# Altium PCB PCB3.PcbDoc (part 2 of 2)
Units mil, origin at the board's own origin, x right, y up, seen from the top; angles counter-clockwise.
Board outline 4805.03 x 4420.03 mil, 2 copper layers (Top Layer, Bottom Layer); 108 components, 108 nets, 556 pads, 252 vias.
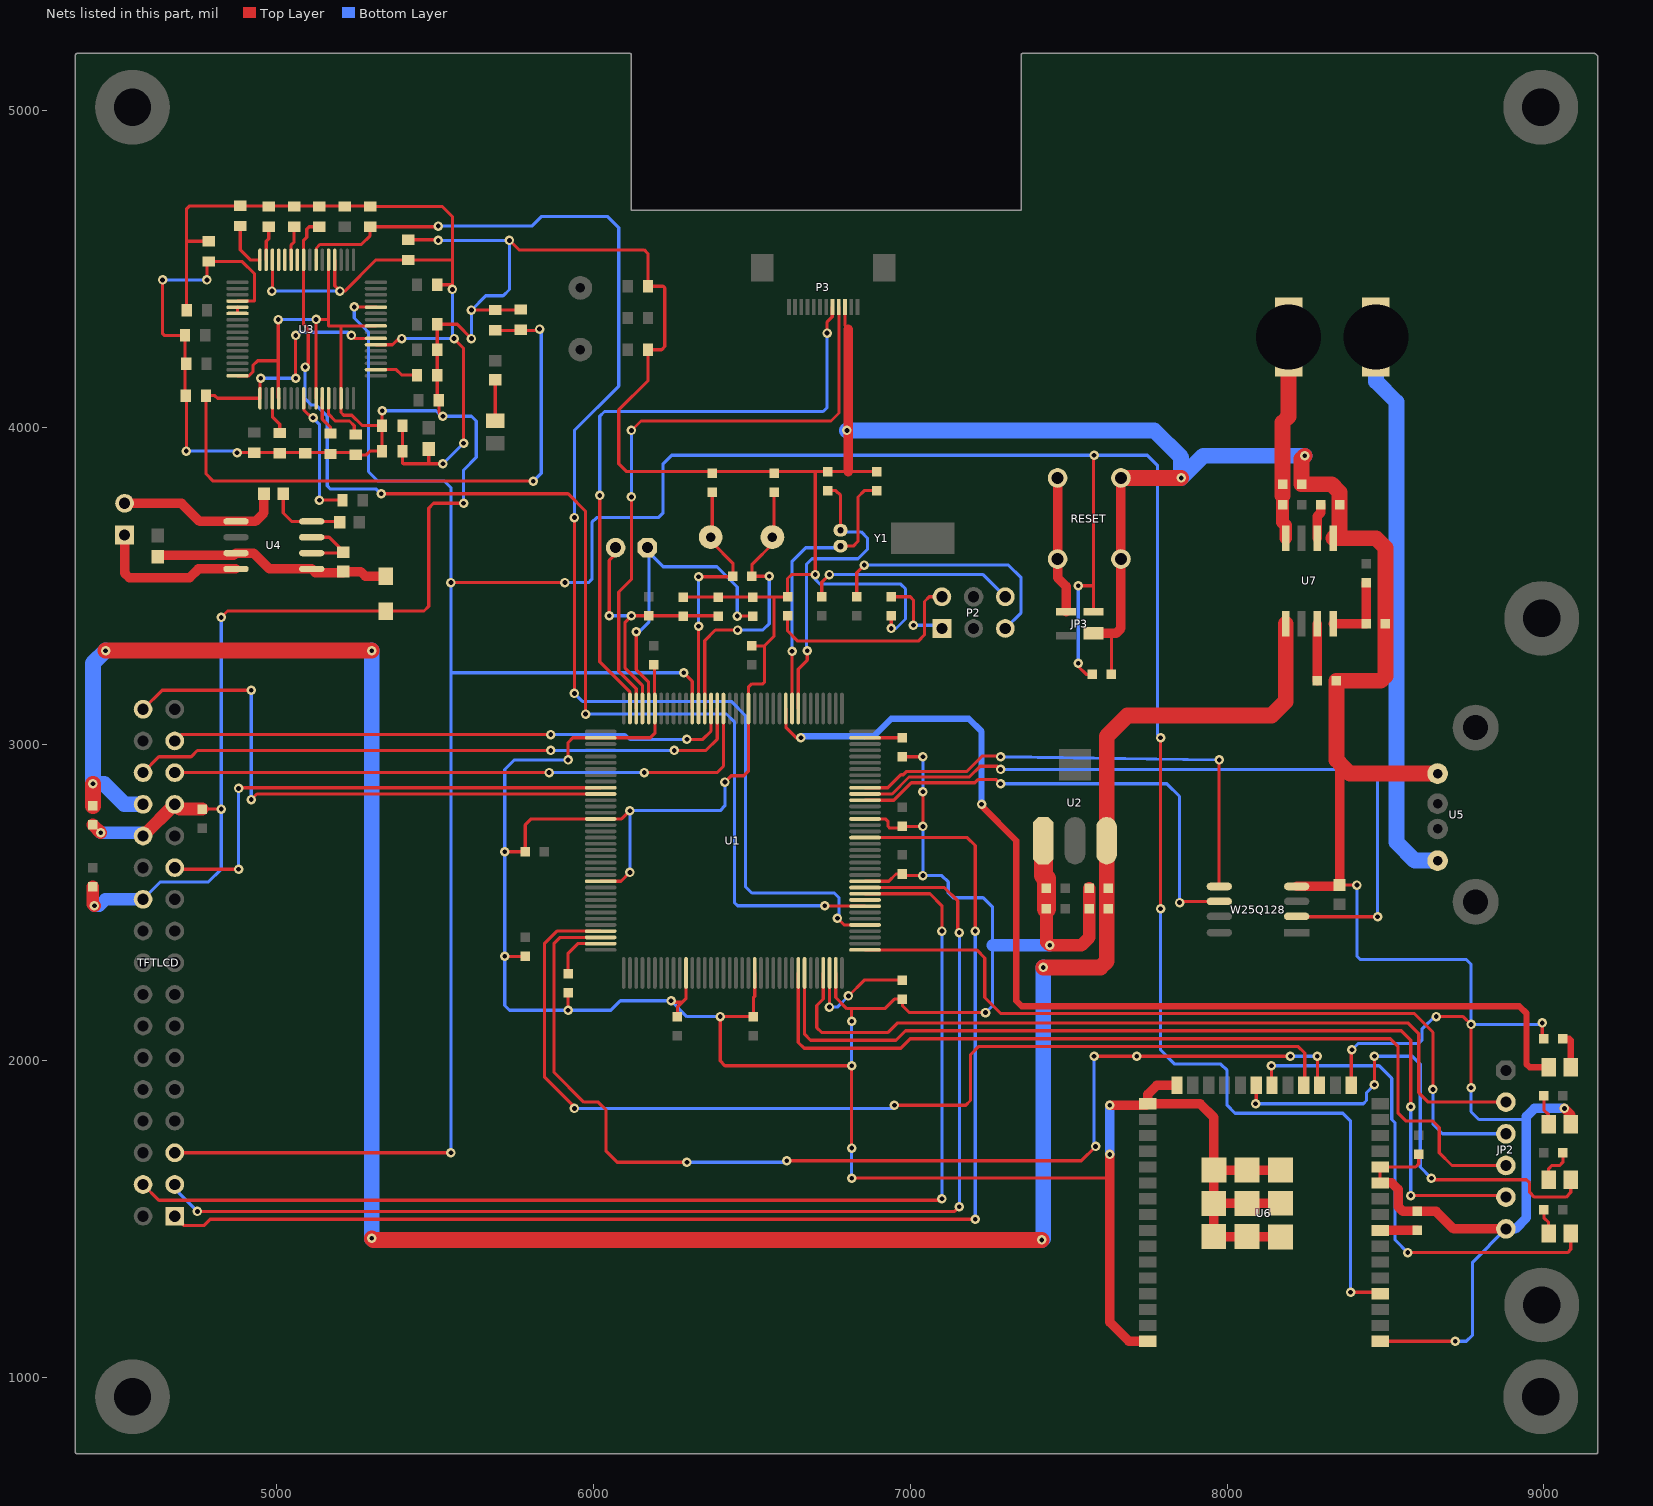
[diagram p2: the nets of this part, all layers, seen from the top]

## Via types
v1: diameter 30, hole 15, Top Layer to Bottom Layer, 252 vias

## Nets (pads, with @x,y where several pads share a name; then routed paths per layer and width w, separated by ;. In a path a pad name is that pad's centre, name@x,y a point inside that pad or via, vN(x,y) a via of type N, cw(c..) or ccw(c..) an arc to the next point about the centre after c; other vN are vias at no path point) (continued)
FSMC_NE4: TFTLCD.1 U1.127 | length 4085.3
  Top Layer w10: TFTLCD.1@4678.35,1510 4708.35,1480 4770,1480 4790,1500 v1(7205,1500) ; U1.127@6857.32,2704.84 7180.16,2704.84 7205,2680 v1(7205,2410)
  Bottom Layer w10: v1(7205,1500) v1(7205,2410)
FSMC_NOE: TFTLCD.4 U1.118 | length 3727.7
  Top Layer w10: TFTLCD.4@4578.35,1610 4628.35,1560 7095,1560 v1(7100,1565) ; U1.118@6857.32,2527.68 7062.32,2527.68 7100,2490 v1(7100,2410)
  Bottom Layer w10: v1(7100,1565) v1(7100,2410)
FSMC_NWE: TFTLCD.3 U1.119 | length 3803.2
  Top Layer w10: v1(4750,1525) 7140,1525 v1(7155,1540) ; U1.119@6857.32,2547.36 7107.64,2547.36 7150,2505 7150,2410 v1(7155,2405)
  Bottom Layer w10: TFTLCD.3@4678.35,1610 4678.35,1596.65 v1(4750,1525) ; v1(7155,1540) v1(7155,2405)
GND: C1.2 C2.2 C3.1 C4.1 C5.1 C6.1 C7.1 C8.1 C9.2 C10.2 C11.2 C12.1 C13.1 C14.2 C15.1 C22.2 C23.1 C24.1 C25.2 C27.2 C28.1 C29.1 C30.1 C31.1 C32.1 C33.1 C34.1 C35.1 C39.2 C40.2 C43.1 C44.2 C45.2 C46.1 C48.2 C127.1 C128.1 C129.1 C130.2 C131.1 C132.2 C133.1 C134.2 C135.1 C136.2 C137.1 JP2.6 JP3.1 P3.3 P.K R4.2 R6.1 R7.1 R9.1 R12.2 R13.2 R16.1 R25.1 R28.2 R112.1 R115.1 RESET.2 TFTLCD.22 TFTLCD.26 TFTLCD.27 U1.16 U1.31 U1.38 U1.51 U1.61 U1.83 U1.94 U1.107 U1.120 U1.130 U2.1 U3.4 U3.10 U3.14 U3.25 U3.37 U3.52 U3.64 U5.1 U6.1 U6.11 U6.12 U6.17 U6.28 U6.29 U6.44 U6.45 U7.1 W25Q128.4 | length 32762.5
  Top Layer w10: v1(4640,4465) 4640,4295 4645,4290 R112.1@4711,4290 4711,4102 C128.1@4713,4100 4715,4098 v1(4715,3925) ; C8.1@4765,2795 v1(4825,2795) ; v1(4780,4465) 4780,4518 C127.1@4785,4523 4892,4523 4930,4485 4930,4398.58 U3.52@4876.5,4398.58 ; v1(4825,3400) 4845,3420 R9.1@5345,3420 5465,3420 5480,3435 5480,3745 5495,3760 v1(5590,3760) ; v1(4875,3920) C132.2@4930,3920 5243,3920 C39.2@5250,3913 5283,3913 5295,3925 C131.1@5333,3925 C130.2@5333,4005 ; U3.64@4876.5,4162.36 4912.91,4162.36 4924.93,4174.38 4924.93,4194.93 4940,4210 5005,4210 ; v1(5005,4340) 5005,4210 ; U3.4@5006.42,4091.5 5005.24,4092.67 5005.24,4129.09 5005,4129.33 5005,4210 ; U3.10@5124.53,4091.5 v1(5124.53,4340.47) 5163.43,4340.47 5163.9,4340 ; U3.37@5163.9,4528.5 5163.9,4340 ; U3.25@5313.5,4319.84 5205,4319.84 ; v1(5333,4052) C130.2@5333,4005 ; C129.1@5415,4592 5508,4592 v1(5510,4590) ; v1(5525,4035) 5512,4048 C133.1@5512,4085 5507,4090 C44.2@5507,4165 C45.2@5507,4245 C136.2@5507,4325 5570,4325 v1(5615,4280) ; v1(5615,4370) C134.2@5690,4370 5768,4370 C135.1@5770,4372 ; v1(5720,2330) C32.1@5785,2330 ; v1(5720,2660) C33.1@5785,2660 5785,2745 5803.9,2763.9 U1.51@6022.68,2763.9 6088.9,2763.9 v1(6115,2790) ; v1(5735,4590) 5765,4560 6160,4560 6172.06,4547.94 C46.1@6172.06,4445 6220,4445 6225,4440 6225,4255 6215,4245 C43.1@6172.06,4245 6172.06,4147.06 6080,4055 6080,3885 6105,3860 6700,3860 ; v1(5920,2160) C25.2@5920,2215 ; v1(5920,2950) 5920,3005 5934.8,3019.8 U1.38@6022.68,3019.8 6179.8,3019.8 6193.94,3033.94 U1.31@6193.94,3112.32 6193.16,3113.1 6193.16,3246.84 C34.1@6190,3250 ; U1.61@6022.68,2567.05 6087.05,2567.05 v1(6115,2595) ; v1(6245,2190) 6240,2185 6280,2185 ; C31.1@6265,2140 6265,2170 6280,2185 ; C24.1@6284.14,3464 C23.1@6393.28,3464 C7.1@6502.43,3464 6570,3464 ; U1.83@6292.36,2277.68 6292.36,2197.36 6280,2185 ; v1(6415,2880) 6435,2900 6475,2900 6489.21,2914.21 U1.16@6489.21,3112.32 6489.21,3179.21 6500,3190 6535,3190 6540,3195 6540,3310 ; C35.1@6500,3310 6540,3310 ; U1.94@6508.9,2277.68 6508.9,2203.9 6505,2200 C30.1@6505,2140 v1(6400,2140) 6400,2000 6415,1985 v1(6815,1985) v1(6815,1725) ; U1.107@6764.8,2277.68 6764.8,2200.2 6800,2165 6815,2165 ; P3.3@6794.06,4380 6794.06,4320.94 6805,4310 ; v1(6815,1630) 7630,1630 ; v1(6815,2125) 6815,2165 ; U1.120@6857.32,2567.05 6932.05,2567.05 6955,2590 C29.1@6975,2590 6980,2585 v1(7040,2585) ; U1.130@6857.32,2763.9 6921.1,2763.9 6930,2755 6930,2740 6935,2735 6970,2735 C28.1@6975,2740 v1(7040,2740) v1(7040,2850) ; C12.1@6895,3860 6805,3860 C13.1@6740,3860 6700,3860 ; v1(6940,3365) R7.1@6940,3405 ; R16.1@6975,2960 v1(7040,2960) ; v1(7237.5,2152.5) 6997.5,2152.5 6975,2175 C27.2@6975,2195 6950,2195 6920,2165 6815,2165 ; 7630,3350.47 7635,3345.47 R28.2@7635,3220 ; C48.2@8355,2555.32 8355.32,2555 v1(8410,2555) ; U6.17@8392.13,1922.87 8392.13,2032.87 v1(8394.25,2035) ; U6.1@8483.07,1115 v1(8720,1115) ; U6.11@8483.07,1615 U6.12@8483.07,1665 8595,1665 8605,1675 C5.1@8605,1705 ; v1(8660,2140) 8745,2140 v1(8770,2115) v1(8770,1915) ; v1(8995,2120) 8995,2075.01 R6.1@9000.01,2070 ; 5163.9,4340 5163.9,4319.84 5205,4319.84 ; 5205,4319.84 5203.27,4318.11 U3.14@5203.27,4091.5 5203.27,4046.73 5212,4038 5237.46,4038 5269.31,4006.14 5331.86,4006.14 C130.2@5333,4005 ; 6540,3310 6570,3340 6570,3464 ; 6570,3464 6611.57,3464 R4.2@6612.57,3465 6612.57,3522.57 6625,3535 v1(6700,3535) 6700,3860
  Top Layer w30: 6805,3860 6805,4310 ; JP3.1@7578.31,3350.47 7630,3350.47 7650.47,3350.47 7665,3365 RESET.2@7665,3584.09 RESET.2@7665,3840 ; v1(7630,1705) 7630,1630 7630,1175 7690,1115 U6.44@7750,1115 ; v1(7630,1860) 7745,1860 U6.29@7750,1865 ; U6.28@7841.73,1922.87 7777.87,1922.87 7750,1895 U6.29@7750,1865 ; U6.45@7957.88,1550.26 U6.45@7958.39,1550.26 ; U6.45@8168.19,1444.71 8167.67,1445.23 U6.45@8063.42,1445.23 U6.45@7957.88,1445.23 7958.39,1445.74 U6.45@7958.39,1550.26 ; U6.45@8168.71,1655.54 8168.45,1655.28 U6.45@7958.39,1655.28 ; U6.45@8168.96,1550.77 8168.45,1550.26 U6.45@7958.39,1550.26 ; W25Q128.4@8219.68,2550.67 8350.35,2550.67 C48.2@8355,2555.32 8355,2940 8345,2950 ; U6.11@8483.07,1615 8520,1615 8540,1595 8540,1540 8555,1525 C6.1@8600,1525 8660,1525 8715,1470 JP2.6@8880,1470 ; v1(9065,1850) 9085.04,1829.96 P.K@9085.04,1800 ; U6.29@7750,1865 7915,1865 7958.39,1821.61 U6.45@7958.39,1655.28 ; U6.45@7958.39,1550.26 U6.45@7958.39,1655.28
  Top Layer w40: C10.2@4420,2550 4420,2495 v1(4425,2490) ; C9.2@4420,2745 4444.89,2720.11 v1(4444.89,2720) ; TFTLCD.26@4578.35,2710 TFTLCD.27@4678.35,2810 4693.35,2795 C8.1@4765,2795 ; C4.1@7430,2480 7430,2375 v1(7440,2365) 7540,2365 7565,2390 C3.1@7565,2480 C1.2@7565,2545
  Top Layer w50: RESET.2@7665,3840 v1(7855,3840) ; v1(8245,3910) 8235,3900 C15.1@8235,3820 8330,3820 8355,3795 C11.2@8355,3755 8355,3670 U7.1@8335,3650 8470,3650 8500,3620 R12.2@8500,3380 8500,3215 8485,3200 R13.2@8345,3200 8345,2950 ; 8355,2940 8387.91,2907.09 U5.1@8664.37,2907.09
  Top Layer w60: U2.1@7420,2695 7420,2585 7430,2575 C2.2@7430,2545 C4.1@7430,2480
  Bottom Layer w10: TFTLCD.22@4578.35,2510 4633.35,2565 4785,2565 4825,2605 v1(4825,2795) v1(4825,3400) ; v1(4640,4465) v1(4780,4465) ; v1(4715,3925) 4870,3925 v1(4875,3920) ; v1(5005,4340) 5005.47,4340.47 v1(5124.53,4340.47) ; v1(5333,4052) 5503,4052 5520,4035 v1(5525,4035) 5615,4035 5630,4020 5630,3905 5590,3865 v1(5590,3760) ; v1(5510,4590) v1(5735,4590) 5735,4435 5715,4415 5660,4415 v1(5615,4370) v1(5615,4280) ; v1(5920,2950) 5750,2950 5720,2920 v1(5720,2660) v1(5720,2330) 5720,2175 5735,2160 v1(5920,2160) 6055,2160 6085,2190 v1(6245,2190) 6295,2140 v1(6400,2140) ; v1(6115,2595) v1(6115,2790) 6400,2790 6415,2805 v1(6415,2880) ; v1(6700,3535) 6700,3520 6715,3505 6970,3505 6985,3490 6985,3395 6955,3365 v1(6940,3365) ; v1(6815,1630) v1(6815,1725) ; v1(6815,1985) v1(6815,2125) ; v1(7040,2740) v1(7040,2585) 7100,2585 7120,2565 7120,2530 7135,2515 7230,2515 7260,2485 7260,2365 7260,2175 v1(7237.5,2152.5) v1@7230,2145 ; v1(7040,2850) v1(7040,2960) ; v1(8394.25,2035) 8414.25,2055 8605,2055 8615,2065 8615,2100 8660,2145 v1(8660,2140) ; v1(8410,2555) 8410,2330 8420,2320 8755,2320 8770,2305 v1(8770,2115) 8995,2115 v1(8995,2120) ; v1(8720,1115) 8755,1115 8775,1135 8775,1365 JP2.6@8880,1470 ; v1(8770,1915) 8770,1840 8795,1815 8935,1815 8945,1825
  Bottom Layer w30: v1(7630,1705) v1(7630,1860) ; JP2.6@8880,1470 8910,1470 8945,1505 8945,1825 8970,1850 v1(9065,1850)
  Bottom Layer w40: v1(4425,2490) 4440,2490 4460,2510 TFTLCD.22@4578.35,2510 ; v1(4444.89,2720) 4568.35,2720 TFTLCD.26@4578.35,2710 ; 7260,2365 v1(7440,2365)
  Bottom Layer w50: v1(6800,3990) 7770,3990 7855,3905 v1(7855,3840) 7925,3910 v1(8245,3910)
GND1: C41.2 C47.2 R9.2 U4.1 U4.7 | length 756.2
  Top Layer w10: U4.7@4865.35,3596.54 U4.7@4871.73,3602.91
  Top Layer w30: C47.2@4625,3591.54 4630,3596.54 U4.7@4865.35,3596.54 ; U4.7@4871.73,3602.91 4927.09,3602.91 4977.09,3552.91 U4.1@5110.71,3552.91 5122.09,3541.54 C41.2@5210,3541.54 ; C41.2@5210,3544.68 5265.31,3544.68 5280,3530 R9.2@5345,3530
IIC_SCL: R26.2 U3.47 | length 107.8
  Top Layer w10: U3.47@4967.05,4528.5 4967.05,4587.05 4975,4595 R26.2@4975,4633
IIC_SDA: R27.2 U3.48 | length 150.4
  Top Layer w10: R27.2@4885,4635 4885,4560 4916.5,4528.5 U3.48@4947.36,4528.5
ILIM: R13.1 U7.7 | length 180
  Top Layer w30: R13.1@8285,3200 U7.7@8285,3380
IN: C15.2 K1.2 R14.2 U7.4 | length 647.2
  Top Layer w40: 8175,3785 R14.2@8175,3755 8175,3700 8184.94,3690.06 U7.4@8184.94,3650
  Top Layer w50: 8175,3785 C15.2@8175,3820 8175,4015 8194.41,4034.41 K1.2@8194.41,4285
LCD_BL: TFTLCD.23 U1.46 | length 1602.4
  Top Layer w10: TFTLCD.23@4678.35,2610 4683.35,2605 v1(4880,2605) ; v1(4880,2860) 4882.32,2862.32 U1.46@6022.68,2862.32
  Bottom Layer w10: v1(4880,2605) v1(4880,2860)
LED0: 0.A U1.10 | length 3491.4
  Top Layer w10: U1.10@6607.32,3112.32 6607.32,3052.68 6640,3020 v1(6655,3020)
  Top Layer w20: v1(7225,2810) 7225,2805 7335,2695 7335,2190 7352,2173 8922,2173 8945,2150 8945,1990 8955,1980 0.A@9014.96,1980
  Bottom Layer w20: v1(6655,3020) 6655,3025 6885,3025 6940,3080 7185,3080 7225,3040 v1(7225,2810)
MIC_BIAS: C39.1 U3.12 | length 176.5
  Top Layer w10: U3.12@5163.9,4091.5 5163.9,4041.1 5185,4020 5230,4020 5245,4005 5245,3982 C39.1@5250,3977
MR: JP3.3 RESET.1 | length 433.7
  Top Layer w30: RESET.1@7465,3840 RESET.1@7465,3584.09 7465,3525 7491.69,3498.31 JP3.3@7491.69,3417.4
NetC6_2: C6.2 U6.8 | length 116.9
  Top Layer w30: U6.8@8483.07,1465 C6.2@8600,1465
NetC25_1: C25.1 U1.71 | length 180.2
  Top Layer w10: C25.1@5920,2275 5920,2340 5950.2,2370.2 U1.71@6022.68,2370.2
NetC27_1: C27.1 U1.106 | length 372.9
  Top Layer w10: v1(6745,2170) 6745,2277.56 U1.106@6745.12,2277.68 ; v1(6805,2205) 6855,2255 C27.1@6975,2255
  Bottom Layer w10: v1(6745,2170) 6770,2170 v1(6805,2205)
NetC38_2: C38.2 U3.8 | length 418.6
  Top Layer w10: U3.8@5085.16,4091.5 5086.33,4091.5 5086.33,4053.91 5110.24,4030 v1(5115,4030) ; v1(5135,3770) C38.2@5208,3770
  Bottom Layer w10: v1(5115,4030) 5135,4010 v1(5135,3770)
NetC40_1: C40.1 U3.11 | length 122.2
  Top Layer w10: U3.11@5144.21,4091.5 5144.21,4025.79 5170,4000 C40.1@5170,3980
NetC41_1: C41.1 U4.2 U4.3 | length 219.3
  Top Layer w10: U4.2@5110.71,3602.91 5204.45,3602.91 5210,3608.46 5165.55,3652.91 U4.3@5110.71,3652.91
NetD1_A: R5.1 R.A | length 81.2
  Top Layer w10: R5.1@9000.01,1530 9000.01,1504.99 9014.96,1490.04 R.A@9014.96,1455
NetD2_A: D2.A R17.2 | length 129.6
  Top Layer w10: D2.A@5690,4020.04 R17.2@5690,4149.68
NetD3_A: L.A R10.1 | length 118.3
  Top Layer w10: L.A@9014.96,1625 9014.96,1659.96 9025,1670 9050,1670 9060,1680 R10.1@9060,1710
NetD4_K: 0.K R6.2 | length 112.1
  Top Layer w20: R6.2@9060.01,2070 9080,2070 9085.04,2064.96 0.K@9085.04,1980
NetD5_A: P.A R8.2 | length 96.2
  Top Layer w10: R8.2@9000,1890 9000,1845 9014.96,1830.04 P.A@9014.96,1800
NetK1_1: K1.1 U5.4 | length 1775.3
  Bottom Layer w50: K1.1@8470,4285 8470,4145 8535,4080 8535,2690 8592.91,2632.09 U5.4@8664.37,2632.09
NetP2_1: P2.1 R7.2 | length 248.3
  Top Layer w10: R7.2@6940,3465 7000,3465 7010,3455 v1(7010,3375)
  Bottom Layer w10: v1(7010,3375) 7090,3375 P2.1@7100,3365
NetP2_2: P2.2 R4.1 | length 667.9
  Top Layer w10: R4.1@6612.57,3405 6612.57,3357.43 6645,3325 7025,3325 7045,3345 7045,3450 7060,3465 P2.2@7100,3465
NetP2_5: P2.5 R3.2 | length 788.1
  Top Layer w10: R3.2@6830.86,3465 6830.86,3540.86 v1@6845,3555
  Bottom Layer w10: v1(6855,3565) 7310,3565 7350,3525 7350,3415 P2.5@7300,3365
NetP2_6: P2.6 R2.1 | length 664.1
  Top Layer w10: R2.1@6720.71,3464.99 6720.71,3510.71 v1(6745,3535)
  Bottom Layer w10: v1(6745,3535) 7230,3535 P2.6@7300,3465
NetR1_2: R1.2 R20.1 U4.4 | length 255.2
  Top Layer w10: R20.1@5020.63,3790 5020.63,3729.37 5047.09,3702.91 U4.4@5110.71,3702.91 5200.16,3702.91 R1.2@5203.07,3700
NetR16_2: R16.2 U1.143 | length 117.8
  Top Layer w10: U1.143@6857.32,3019.8 6974.8,3019.8 R16.2@6975,3020
NetR115_2: R115.2 U3.3 | length 119.1
  Top Layer w10: U3.3@4986.73,4091.5 4986.73,4033.27 5010,4010 R115.2@5010,3982
NetU3_53: U3.53 U3.54 | length 19.7
  Top Layer w10: U3.54@4876.5,4359.21 U3.53@4876.5,4378.9
nlink: L.K U6.23 | length 1621.8
  Top Layer w10: v1(8090,1865) 8092.13,1867.13 U6.23@8092.13,1922.87 ; v1(8465,1925) v1(8465,2015) ; v1(8645,1630) 8650,1625 8945,1625 8955,1615 8955,1585 8970,1570 9070,1570 9085.04,1585.04 L.K@9085.04,1625
  Bottom Layer w10: v1(8090,1865) 8430,1865 8440,1875 8440,1900 v1(8465,1925) ; v1(8465,2015) 8585,2015 8610,1990 8610,1665 v1(8645,1630)
nready: R.K U6.22 | length 1599.4
  Top Layer w10: v1(8140,1985) 8140,1925 U6.22@8142.13,1922.87 ; v1(8570,1395) 9075,1395 9085.04,1405.04 R.K@9085.04,1455
  Bottom Layer w10: v1(8140,1985) 8480,1985 8520,1945 8520,1815 8530,1805 8530,1435 v1(8570,1395)
OSC32_IN: C13.2 U1.8 Y1.2 | length 967.1
  Top Layer w10: U1.8@6646.69,3112.32 6646.69,3236.69 6675,3265 v1(6675,3295) ; C13.2@6740,3800 6765,3800 6780,3785 Y1.2@6780,3675
  Bottom Layer w10: v1(6675,3295) 6672,3298 6672,3567 6690,3585 6835,3585 6865,3615 6865,3650 6845,3670 6785,3670 Y1.2@6780,3675
OSC32_OUT: C12.2 U1.9 Y1.1 | length 885
  Top Layer w10: U1.9@6627.01,3112.32 v1(6627.01,3292.99) ; Y1.1@6780,3625 6820,3625 6835,3640 6835,3780 6855,3800 C12.2@6885,3800
  Bottom Layer w10: v1(6627.01,3292.99) 6627.01,3577.01 6670,3620 Y1.1@6770,3620
OSC_IN: C22.1 R15.1 U1.23 Y2.1 | length 939
  Top Layer w10: U1.23@6351.42,3112.32 6351.42,3326.42 6385,3360 v1(6455,3360) ; v1(6555,3530) R15.1@6500,3530 6500,3566.46 6569.92,3636.38 6570,3636.46 C22.1@6570,3795
  Bottom Layer w10: v1(6455,3360) 6535,3360 6555,3380 v1(6555,3530) ; Y2.1@6569.92,3636.38 Y2.1@6570,3636.46
OSC_OUT: C14.1 R15.2 U1.24 Y2.2 | length 818.6
  Top Layer w10: U1.24@6331.73,3112.32 v1(6331.73,3371.73) v1@6331.73,3373.27 ; v1(6331.73,3528.27) 6438.27,3528.27 R15.2@6440,3530 6440,3571.3 6374.92,3636.38 6375,3636.46 C14.1@6375,3795
  Bottom Layer w10: v1(6331.73,3371.73) v1(6331.73,3528.27) ; Y2.2@6374.92,3636.38 Y2.2@6375,3636.46
OUT: C1.1 C3.2 C9.1 TFTLCD.28 U2.3 U7.5 | length 8139.8
  Top Layer w50: C9.1@4420,2805 v1(4420,2875) ; v1(4460,3295) v1(5300,3295) ; v1(5300,1440) 5305,1435 v1(7415,1435) ; v1(7420,2295) 7600,2295 7620,2315 7620,2545 U2.3@7620,2695 7620,3025 7685,3090 8140,3090 8185,3135 U7.5@8185,3380
  Bottom Layer w50: v1(4460,3295) 4420,3255 v1(4420,2875) 4455,2875 4520,2810 TFTLCD.28@4578.35,2810 ; v1(5300,1440) v1(5300,3295) ; v1(7415,1435) 7420,1440 v1(7420,2295)
OVP: R11.2 R12.1 U7.8 | length 235
  Top Layer w30: U7.8@8335,3380 R12.1@8440,3380 R11.2@8440,3510
PB1: TFTLCD.34 U1.47 | length 1821.5
  Top Layer w10: TFTLCD.34@4578.35,3110 4638.35,3170 v1(4920,3170) ; v1(4920,2825) 4937.64,2842.64 U1.47@6022.68,2842.64
  Bottom Layer w10: v1(4920,2825) v1(4920,3170)
PD3: U1.117
PF8: TFTLCD.29 U1.20 | length 1922.5
  Top Layer w10: TFTLCD.29@4678.35,2910 v1(5860,2910) ; v1(6160,2910) 6390,2910 6410.47,2930.47 U1.20@6410.47,3112.32
  Bottom Layer w10: v1(5860,2910) v1(6160,2910)
PF9: TFTLCD.30 U1.21 | length 1952.8
  Top Layer w10: TFTLCD.30@4578.35,2910 4628.35,2960 4730,2960 4750,2980 v1(5865,2980) ; v1(6255,2980) 6355,2980 6390.79,3015.79 U1.21@6390.79,3112.32
  Bottom Layer w10: v1(5865,2980) v1(6255,2980)
PF10: TFTLCD.31 U1.22 | length 1789.3
  Top Layer w10: TFTLCD.31@4678.35,3010 4698.35,3030 v1(5865,3030) ; v1(6295,3015) 6345,3015 6371.1,3041.1 U1.22@6371.1,3112.32
  Bottom Layer w10: v1(5865,3030) 6100,3030 6115,3015 v1(6295,3015)
RESET: JP3.2 R28.1 TFTLCD.5 U1.25 U3.28 U6.4 | length 11430.5
  Top Layer w10: TFTLCD.5@4678.35,1710 v1(5550,1710) ; v1(5245,4380) 5312.4,4380 U3.28@5313.5,4378.9 ; v1(5550,3510) v1(5910,3510) ; v1(6285,3225) 6312.05,3197.95 U1.25@6312.05,3112.32 ; v1(7530,3255) 7530,3245 7555,3220 R28.1@7575,3220 ; v1(7530,3500) 7578.31,3500 ; JP3.2@7578.31,3417.4 7578.31,3500 ; v1(7580,3911.61) 7578.31,3913.31 7578.31,3500 ; v1(7790,2480) v1(7790,3020) ; v1(8390,1270) 8478.07,1270 U6.4@8483.07,1265
  Bottom Layer w10: v1(5245,4380) 5245,4345 5290,4300 5290,3860 5320,3830 5530,3830 5550,3810 v1(5550,3510) 5550,3225 ; v1(5550,1710) 5550,3225 ; v1(5910,3510) 5985,3510 5995,3520 5995,3700 6010,3715 6205,3715 6220,3730 6220,3885 6246.61,3911.61 v1(7580,3911.61) 7748.39,3911.61 7780,3880 7780,3030 v1(7790,3020) v1@7795,3015 ; v1(6285,3225) 5550,3225 ; v1(7530,3255) v1(7530,3500) ; v1(7790,2480) 7790,2035 7835,1990 7980,1990 8000,1970 8000,1860 8025,1835 8365,1835 8390,1810 v1(8390,1270)
RXD: R23.2 U1.113 U3.39 | length 4184.4
  Top Layer w10: U3.39@5124.53,4528.5 5125.7,4528.5 5125.7,4566.09 5136.54,4576.94 5266.94,4576.94 5295,4605 R23.2@5295,4633 5508,4633 v1(5510,4635) ; v1(5940,3160) v1(5940,3715) ; v1(6770,2450) 6790.75,2429.25 U1.113@6857.32,2429.25
  Bottom Layer w10: v1(5510,4635) 5805,4635 5835,4665 6045,4665 6080,4630 6080,4130 5940,3990 v1(5940,3715) ; v1(5940,3160) 5965,3135 6435,3135 6480,3090 6480,2550 6500,2530 6760,2530 6775,2515 6775,2445 v1(6770,2450)
"SPI1 MISO": U1.134 W25Q128.2 | length 2367.1
  Top Layer w10: U1.134@6857.32,2842.64 6942.58,2842.64 6995.95,2896 7186.4,2896 7220.4,2930 7275,2930 v1(7285,2920) ; W25Q128.2@8219.68,2456.18 8220.87,2455 v1(8475,2455)
  Bottom Layer w10: v1(7285,2920) 8455,2920 8475,2900 v1(8475,2455)
"SPI1 MOSI": U1.135 W25Q128.5 | length 1559.9
  Top Layer w10: U1.135@6857.32,2862.32 6929.32,2862.32 6970.38,2903.38 6977.87,2903.38 6988.49,2914 7178.95,2914 7195.95,2931 7227.47,2962.53 7282.47,2962.53 v1(7285,2960) ; v1(7975,2950) 7975,2551.26 W25Q128.5@7975.59,2550.67
  Bottom Layer w10: v1(7285,2960) v1(7975,2950)
"SPI1 SCK": U1.133 W25Q128.6 | length 1512.9
  Top Layer w10: U1.133@6857.32,2822.95 6948.35,2822.95 7003.4,2878 7203.4,2878 7213.4,2888 7272,2888 v1(7285,2875) ; v1(7850,2500) 7853.43,2503.43 W25Q128.6@7975.59,2503.43 W25Q128.6@7969.02,2510
  Bottom Layer w10: v1(7285,2875) 7810,2875 7850,2835 v1(7850,2500)
SPI_CLK: U3.42
SPI_CS: R24.2 U3.43 | length 108.3
  Top Layer w10: U3.43@5045.79,4528.5 5045.79,4575.79 5055,4585 R24.2@5055,4633
SPI_MISO: U3.45
SPI_MOSI: U3.44
SPKL: P1.2 R20.2 U4.5 | length 560.2
  Top Layer w10: P1.2@4520,3760 P1.2@4537.91,3777.91
  Top Layer w30: P1.2@4520,3760 4700,3760 4757.09,3702.91 U4.5@4871.73,3702.91 4932.91,3702.91 4960,3730 R20.2@4960,3790
SPKN: P1.1 U4.8 | length 489.5
  Top Layer w30: P1.1@4520,3660 4520,3540 4535,3525 4725,3525 4752.91,3552.91 U4.8@4871.73,3552.91
SS: C11.1 U7.2 | length 109.2
  Top Layer w30: U7.2@8284.94,3650 8284.94,3719.94 8295,3730 C11.1@8295,3755
SWCLK: JP2.3 U1.109 | length 2506.2
  Top Layer w10: U1.109@6857.32,2350.51 7209.49,2350.51 7235,2325 7235,2200 7285,2150 8590,2150 8650,2090 v1(8650,1910)
  Bottom Layer w10: v1(8650,1910) 8650,1800 8680,1770 JP2.3@8880,1770
SWDIO: JP2.2 U1.105 | length 2587
  Top Layer w10: U1.105@6725.43,2277.68 6725.43,2195.43 6705,2175 6705,2105 6720,2090 6930,2090 6960,2120 8570.46,2120 8605,2085.46 8605,1900 8635,1870 JP2.2@8880,1870
TXD: R118.2 U1.116 U3.41 | length 3861.1
  Top Layer w10: v1(5090,4190) 5100,4200 5100,4310 5085.16,4324.84 U3.41@5085.16,4528.5 5085.16,4590.16 5095,4600 5095,4625 5103,4633 R118.2@5135,4633 ; v1(5330,3790) 5920,3790 5975,3735 v1(5975,3095) ; v1(6730,2490) 6730.91,2489.09 6856.54,2489.09 U1.116@6857.32,2488.31
  Bottom Layer w10: v1(5090,4190) 5090,4090 5110,4070 5125,4070 5160,4035 5160,3815 5170,3805 5315,3805 v1(5330,3790) ; v1(5975,3095) 6420,3095 6445,3070 6445,2500 6455,2490 v1(6730,2490)
USART1_RX: JP2.5 U1.102 | length 2932.3
  Top Layer w10: U1.102@6666.38,2277.68 6666.38,2083.62 6685,2065 6955,2065 6985,2095 8550,2095 8580,2065 v1(8580,1855) ; v1(8580,1575) 8875,1575 JP2.5@8880,1570
  Bottom Layer w10: v1(8580,1575) v1(8580,1855)
USART1_TX: JP2.4 U1.101 | length 2808.3
  Top Layer w10: U1.101@6646.69,2277.68 6646.69,2058.31 6665,2040 6970,2040 7000,2070 8515,2070 8540,2045 8540,1835 8565,1810 8650,1810 8670,1790 8670,1710 8710,1670 JP2.4@8880,1670
USART3_RX: U1.70 U6.19 | length 3578.2
  Top Layer w10: U1.70@6022.68,2389.88 5894.88,2389.88 5875,2370 5875,1965 5970,1870 6015,1870 6040,1845 6040,1714.54 6074.54,1680 v1(6295,1680) ; v1(6610,1685) 7540,1685 v1(7585,1730) ; v1(7580,2015) v1(7715,2015) v1(8200,2015) ; v1(8285,2015) 8285,1930 U6.19@8292.13,1922.87
  Bottom Layer w10: v1(6295,1680) 6605,1680 v1(6610,1685) ; v1(7580,2015) 7580,1735 v1(7585,1730) ; v1(8200,2015) v1(8285,2015) v1@8285,2010
USART3_TX: U1.69 U6.20 | length 3338.3
  Top Layer w10: v1(5940,1850) 5940,1855 5845,1950 5845,2370 5884.57,2409.57 U1.69@6022.68,2409.57 ; v1(6950,1860) 7175,1860 7190,1875 7190,2020 7215,2045 8225,2045 8245,2025 U6.20@8245,1910
  Bottom Layer w10: v1(5940,1850) v1@6945,1850
USART4_RX: P3.5 U1.35 | length 2016.8
  Top Layer w10: v1(6020,3785) 6020,3260 6115.2,3164.8 U1.35@6115.2,3112.32 ; v1@6736.69,4298.31 v1(6737.5,4297.5) 6737.5,4332.62 6753.91,4349.02 6753.91,4379.22 P3.5@6754.69,4380
  Bottom Layer w10: v1(6020,3785) 6020,4035 6035,4050 6725,4050 6737.5,4062.5 v1(6737.5,4297.5)
USART4_TX: P3.4 U1.34 | length 1930.1
  Top Layer w10: v1(6120,3780) 6120,3520 6080,3480 6080,3230 6134.88,3175.12 U1.34@6134.88,3112.32 ; v1(6120,3990) 6150,4020 6750,4020 6775.15,4045.15 6775.15,4379.22 P3.4@6774.37,4380
  Bottom Layer w10: v1(6120,3780) v1(6120,3990)
VDD12: C128.2 C134.1 C135.2 U3.1 U3.23 | length 2690.5
  Top Layer w10: v1(4950,4155) 4950,4159.72 4947.36,4162.36 U3.1@4947.36,4091.5 4813.5,4091.5 4805,4100 C128.2@4777,4100 4777,3853 4800,3830 v1(5810,3830) ; v1(5060,4155) v1(5060,4290) ; v1(5235.94,4290) 5245.47,4280.47 U3.23@5313.5,4280.47 ; C134.1@5690,4306 5826,4306 v1(5830,4310)
  Bottom Layer w10: v1(4950,4155) v1(5060,4155) ; v1(5060,4290) 5070,4300 5225,4300 5235,4290 v1(5235.94,4290) ; v1(5810,3830) 5835,3855 5835,4310 v1(5830,4310)
VDD33: C127.2 C129.2 C130.1 C131.2 FB1.2 R19.2 R21.1 R23.1 R24.1 R26.1 R27.1 R116.2 R118.1 U3.22 U3.36 U3.46 | length 3465.9
  Top Layer w10: R116.2@4716,4370 4715,4371 4715,4590 ; C127.2@4785,4587 4718,4587 4715,4590 ; v1(4985,4430) 4986.73,4431.73 U3.46@4986.73,4528.5 ; U3.36@5183.58,4528.5 5183.58,4446.42 v1(5200,4430) 5215,4430 5313,4528 C129.2@5415,4528 5553,4528 5555,4530 ; U3.22@5313.5,4260.79 5365.79,4260.79 5385,4280 v1(5395,4280) ; C130.1@5397,4005 C131.2@5397,3925 5397,3888 5400,3885 5480,3885 ; FB1.2@5480,3931.54 5480,3885 ; R19.2@5507,4450 5555,4450 5555,4530 ; v1(5525,3885) 5480,3885 ; v1(5560,4280) 5590,4250 v1(5590,3950) ; 4715,4590 4715,4688 4726,4699 R27.1@4885,4699 5135,4699 5293,4699 R23.1@5295,4697 5523,4697 5555,4665 5555,4530
  Bottom Layer w10: v1(4985,4430) v1(5200,4430) ; v1(5395,4280) v1(5560,4280) 5555,4285 v1(5555,4435) ; v1(5525,3885) v1(5590,3950)
VDDA: C23.2 C24.2 JP1.2 R18.2 U1.33 | length 878.2
  Top Layer w10: v1(6050,3405) 6050,3580 JP1.2@6075,3605 ; U1.33@6155,3112.76 U1.33@6154.57,3112.32 6154.57,3185.43 6100,3240 6100,3385 v1(6120,3405) R18.2@6175,3404.99 6392.29,3404.99 C23.2@6393.28,3404
  Bottom Layer w10: v1(6050,3405) v1(6120,3405)
VREF: C44.1 U3.18 | length 136.6
  Top Layer w10: U3.18@5313.5,4182.05 5377.95,4182.05 5395,4165 C44.1@5443,4165
VREF+: C7.2 JP1.1 U1.32 | length 998.9
  Top Layer w10: v1(6135,3355) 6135,3235 6174.25,3195.75 U1.32@6174.25,3112.32 ; v1@6451,3404 v1(6454,3404) C7.2@6502.43,3404
  Bottom Layer w10: v1(6135,3355) 6145,3355 6175,3385 6175,3605 6220,3560 6390,3560 6454,3496 v1(6454,3404)
pads on no net: P3.1 P3.6 P3.7 P3.8 P3.9 P3.10 P3.11 P3.12 P3.14 P3.15 TFTLCD.32 U1.1 U1.2 U1.3 U1.4 U1.5 U1.6 U1.7 U1.11 U1.12 U1.13 U1.14 U1.15 U1.18 U1.19 U1.26 U1.27 U1.28 U1.29 U1.36 U1.37 U1.40 U1.41 U1.42 U1.43 U1.44 U1.45 U1.49 U1.53 U1.54 U1.55 U1.56 U1.57 U1.73 U1.74 U1.76 U1.80 U1.81 U1.82 U1.87 U1.88 U1.89 U1.90 U1.91 U1.92 U1.93 U1.96 U1.97 U1.98 U1.99 U1.103 U1.104 U1.110 U1.111 U1.112 U1.122 U1.123 U1.124 U1.125 U1.126 U1.128 U1.129 U1.132 U1.136 U1.137 U1.139 U1.140 U1.141 U1.142 U3.5 U3.6 U3.9 U3.13 U3.15 U3.19 U3.30 U3.31 U3.32 U3.33 U3.34 U3.35 U3.38 U3.58 U3.61 U3.63 U5.2 U5.3 U5.GND U6.2 U6.3 U6.5 U6.6 U6.7 U6.9 U6.10 U6.15 U6.16 U6.18 U6.21 U6.24 U6.25 U6.26 U6.27 U6.30 U6.31 U6.32 U6.33 U6.34 U6.35 U6.36 U6.37 U6.38 U6.39 U6.40 U6.41 U6.42 U6.43 U7.6 Y1.

## Polygon pours and split planes (outlines as drawn)
GND on Bottom Layer "GND1_L01_P-001" (solid, remove dead copper, pour order 172): 7240,780 7250,790 7250,1220 8735,1220 8735,805 8760,780 9165,780 9165,5145 9150,5160 7355,5160 7355,4700 7370,4685 7365,4680 6100,4680 6100,5130 6055,5175 4385,5175 4385,3880 4375,3870 4425,3820 5380,3820 5385,3825 5390,3820 5390,3480 5385,3485 4380,3485 4380,795 4365,780
GND on Bottom Layer "Bottom Layer-GND 1" (solid, pour order 40): 4375,5165
GND on Bottom Layer "Bottom Layer-GND 2" (solid, pour order 30): 5105,5530
GND on Top Layer "GND1_L01_P-001" (solid, remove dead copper, pour order 168): 7380,5175 7390,5165 9170,5165 9170,760 9165,755 9155,765 8695,765 8695,2015 8670,2040 7000,2040 7000,825 7040,785 7275,785
GND on Top Layer "GND1_L01_P-001" (solid, remove dead copper, pour order 162): 7980,2280 7540,2280 7500,2240 7500,1205 7295,1205 7270,1180 7290,1160 7290,775 5710,775 5640,845 5640,1215 6380,1215 7120,1955 7120,2225 7370,2225 7510,2365 7535,2340 7835,2340
GND on Top Layer "GND1_L01_P-001" (solid, remove dead copper, pour order 160): 7750,2805 7750,2225 7670,2145 7670,1220 7685,1205 7635,1155 7635,1150 5855,1150 5815,1110 5655,1270 5655,2065 7230,2065 7320,1975 7410,2065 7410,2850
GND on Top Layer "GND1_L01_P-001" (solid, remove dead copper, pour order 148): 5860,785 7390,785 7410,765 7440,795 7440,4680 6225,4680 5915,4370 5915,3830 5505,3830 5435,3900 5435,3185 5445,3195 6930,3195 6930,2200 5770,2200 5750,2220 5740,2210 5740,960
GND on Top Layer "GND1_L01_P-001" (solid, remove dead copper, pour order 146): 4375,3445 4385,3435 5900,3435 5905,3440 5910,3435 5910,765 4370,765 4370,3440
GND on Top Layer "GND1_L01_P-001" (solid, remove dead copper, pour order 144): 4660,4080 5575,4080 5580,4085 5585,4080 5585,3860 5595,3850 4655,3850 4655,4080 4650,4085
GND on Top Layer "GND1_L01_P-001" (solid, remove dead copper, pour order 142): 4815,5165 6110,5165 6115,5160 6115,4680 6260,4680 6260,3825 6255,3820 5435,3820 5435,4580 4690,4580 4680,4590 4685,4595 4685,5150
GND on Top Layer "GND1_L01_P-001" (solid, remove dead copper, pour order 138): 4810,5150
GND on Top Layer "GND1_L01_P-001" (solid, remove dead copper, pour order 136): 4370,5175 4370,3835 4775,3835 4780,3840 4815,3840 4815,5165 4805,5175
GND on Top Layer "GND1_L01_P-001" (solid, remove dead copper, pour order 134): 4390,3780
GND1 on Top Layer "GND1_L01_P-001" (solid, remove dead copper, pour order 130): 5365,3470 5365,3790 4440,3790 4435,3785 4440,3780 4440,3740 5160,3740 5165,3745 5170,3740 5170,3480 5365,3480 5370,3475
GND1 on Top Layer "GND1_L01_P-001" (solid, remove dead copper, pour order 128): 5370,3570
GND1 on Top Layer "GND1_L01_P-001" (solid, remove dead copper, pour order 124): 5375,3580 5310,3580 5305,3575 5090,3575 5095,3570 5095,3545 4930,3545 4915,3530 4915,3520 4810,3520 4805,3525 4805,3790 4370,3790 4370,3460 5375,3460
GND1 on Top Layer "Top Layer-GND1" (solid, remove dead copper, pour order 120): 4590,3490
GND1 on Top Layer "Top Layer-GND1 4" (solid, remove dead copper, pour order 110): 4383.25,3585
GND1 on Top Layer "Top Layer-GND1 1" (solid, remove dead copper, pour order 80): 4460,3925
GND on Top Layer "Top Layer-GND" (solid, pour order 46): 4660,5410

## Keep-outs
Keep-Out Layer:
  lines w10: 4370,765 4370,5175 6115,5175 6115,4680 7355,4680 7355,5175 9160,5175 9165,5170 9165,765 4370,765

## Silkscreen, mask and mechanical layers (free items; w line width, h text height)
Top Overlay:
  text "2018-7-22" at 5585,1220 h60
  text "HDU-LAB" at 5600,1085 h60
  text "V1.0" at 5600,945 h60
Bottom Overlay:
  text "3V3" at 8805,1950 h35
  text "DIO" at 8805,1860 h35
  text "CLK" at 8805,1760 h35
  text "TX" at 8805,1650 h35
  text "RX" at 8805,1555 h35
  text "GND" at 8805,1450 h35

## Text inside footprints (layer, text, board x,y; h text height)
P2: Top Overlay "1" at 7020,3345 h32; Top Overlay "2" at 7000,3445 h32; Top Overlay "5" at 7360,3345 h32; Top Overlay "6" at 7360,3445 h32
P3: Top Overlay "1" at 6853.27,4332.72 h59.06 r180; Top Overlay "12" at 6650.51,4332.72 h59.06 r180
TFTLCD: Top Overlay "2" at 4598.35,1390 h32 r90; Top Overlay "1" at 4698.35,1390 h32 r90; Top Overlay "33" at 4698.35,3170 h32 r90; Top Overlay "34" at 4598.35,3170 h32 r90
U2: Top Overlay "3" at 7594,2868 h32; Top Overlay "1" at 7414,2868 h32